# Altium PCB ecg-go.PcbDoc
Units mm, origin at the board's own origin, x right, y up, seen from the top; angles counter-clockwise.
Board outline 40 x 40 mm, 2 copper layers (Top Layer, Bottom Layer), stack 1.071 mm thick; 43 components, 44 nets, 168 pads, 37 vias.
Unrouted connection lines stored in the file: 25.
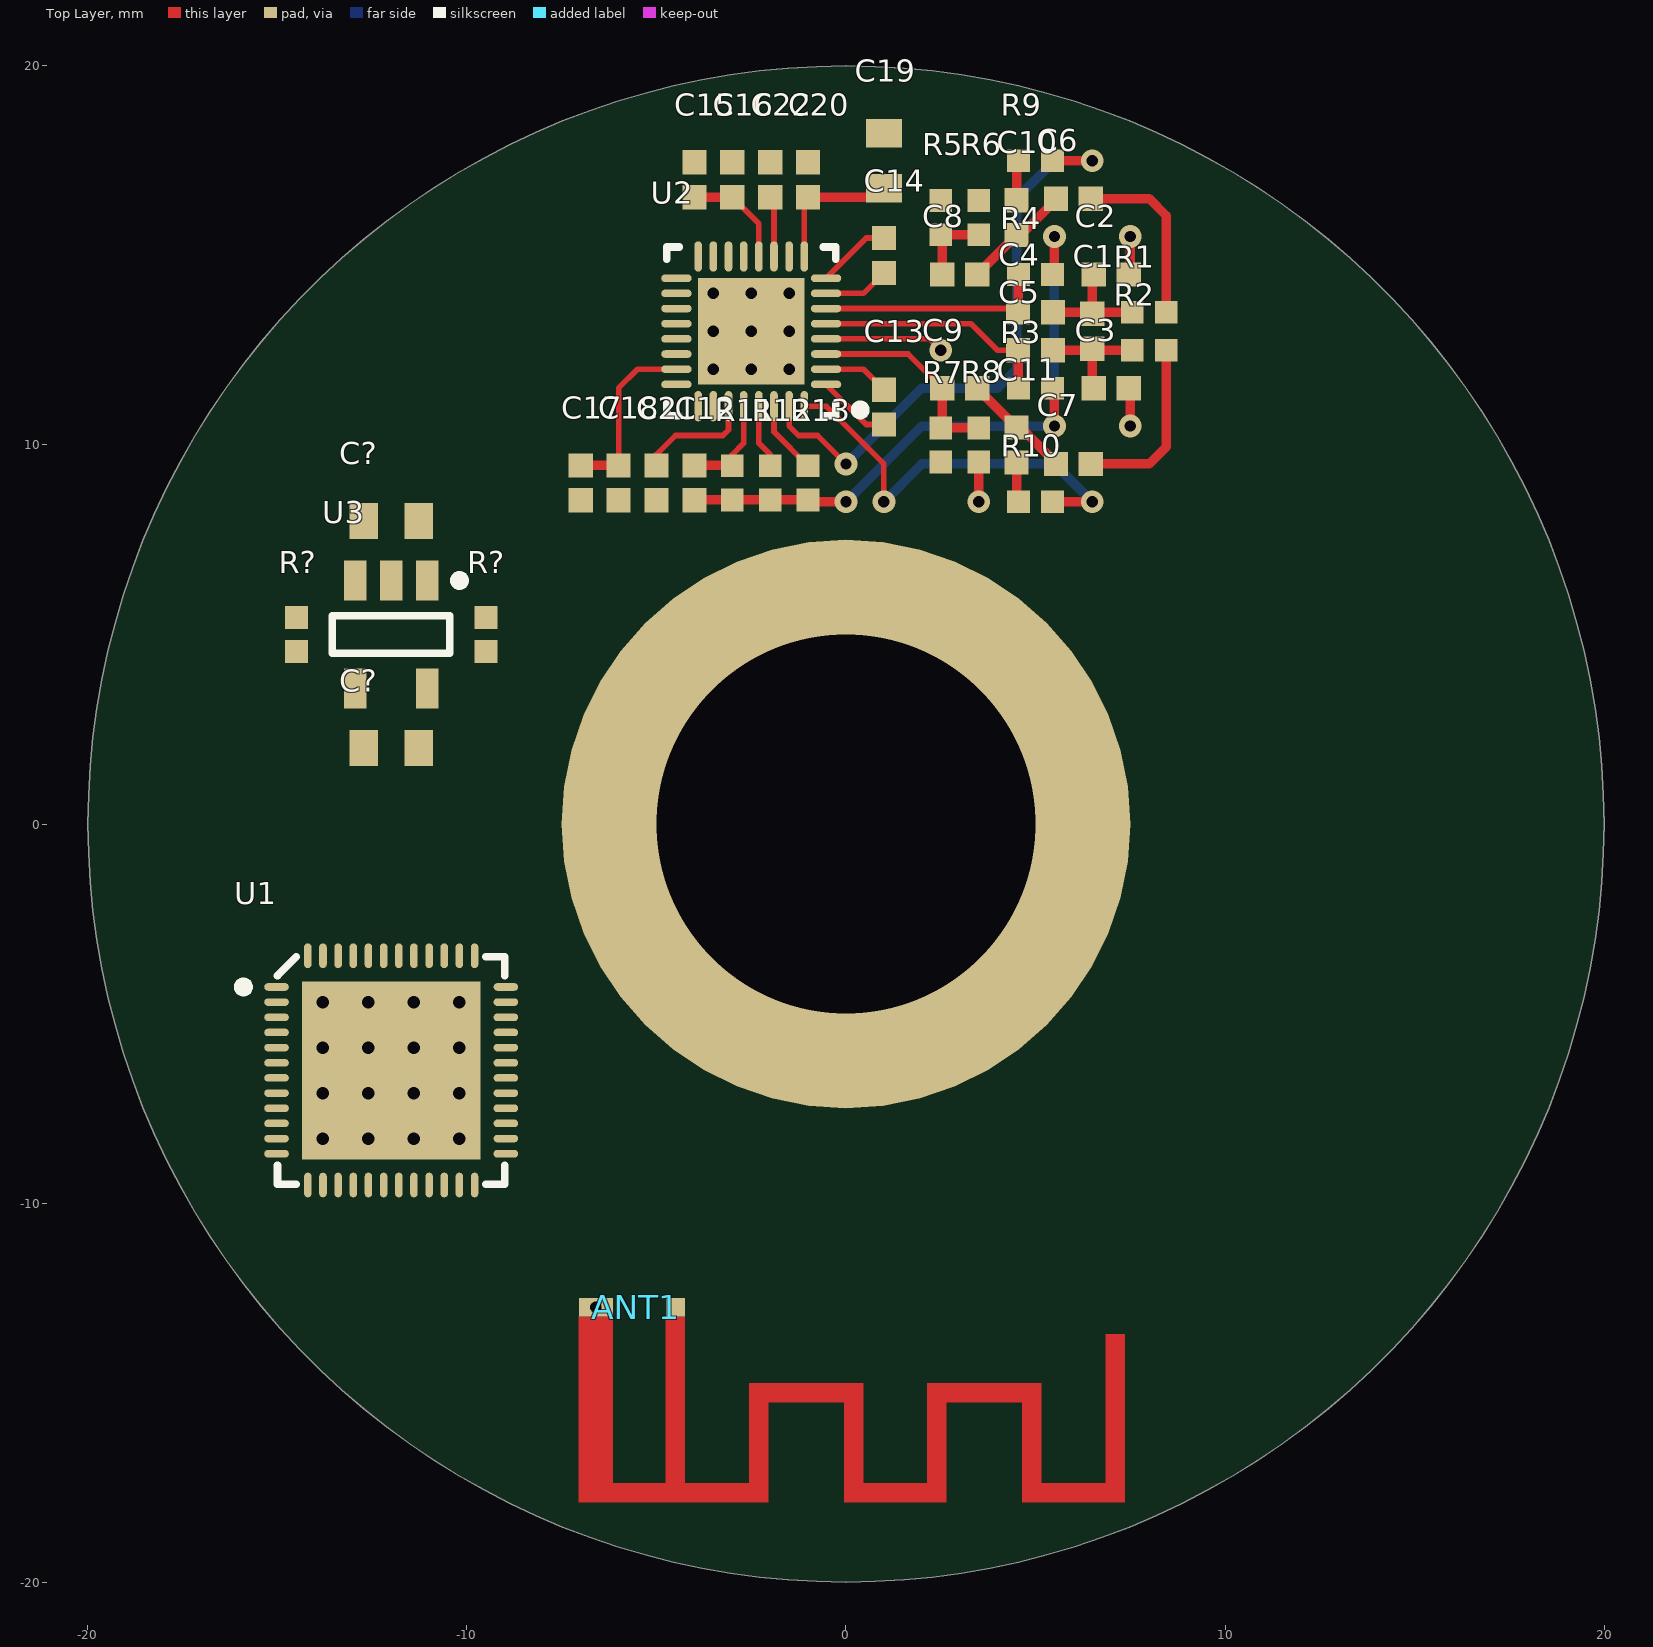
[diagram p0: Top Layer view]
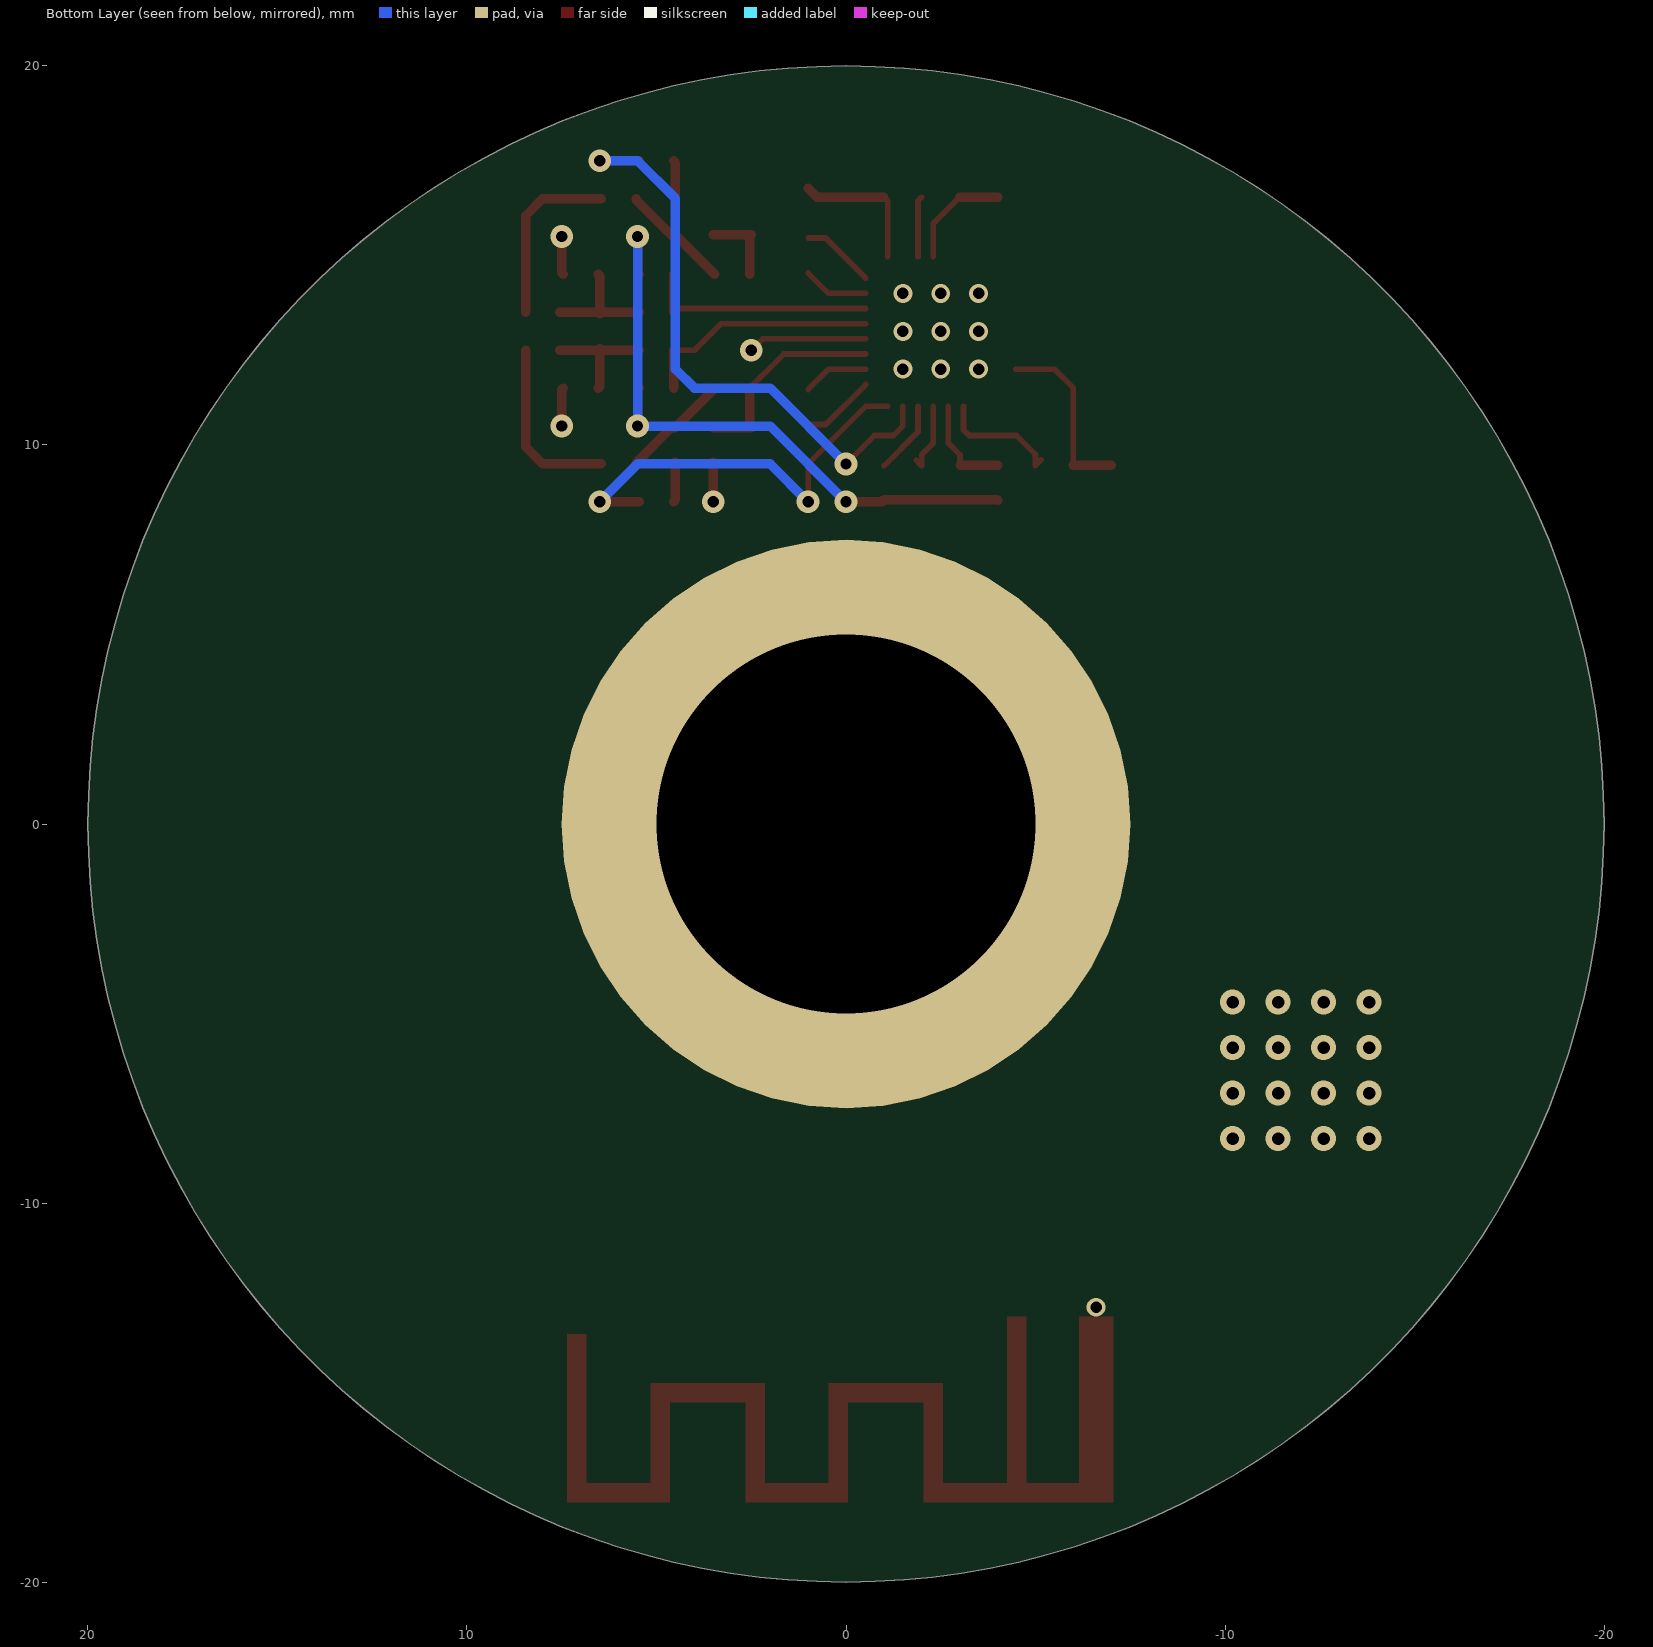
[diagram p1: Bottom Layer view, seen from below]
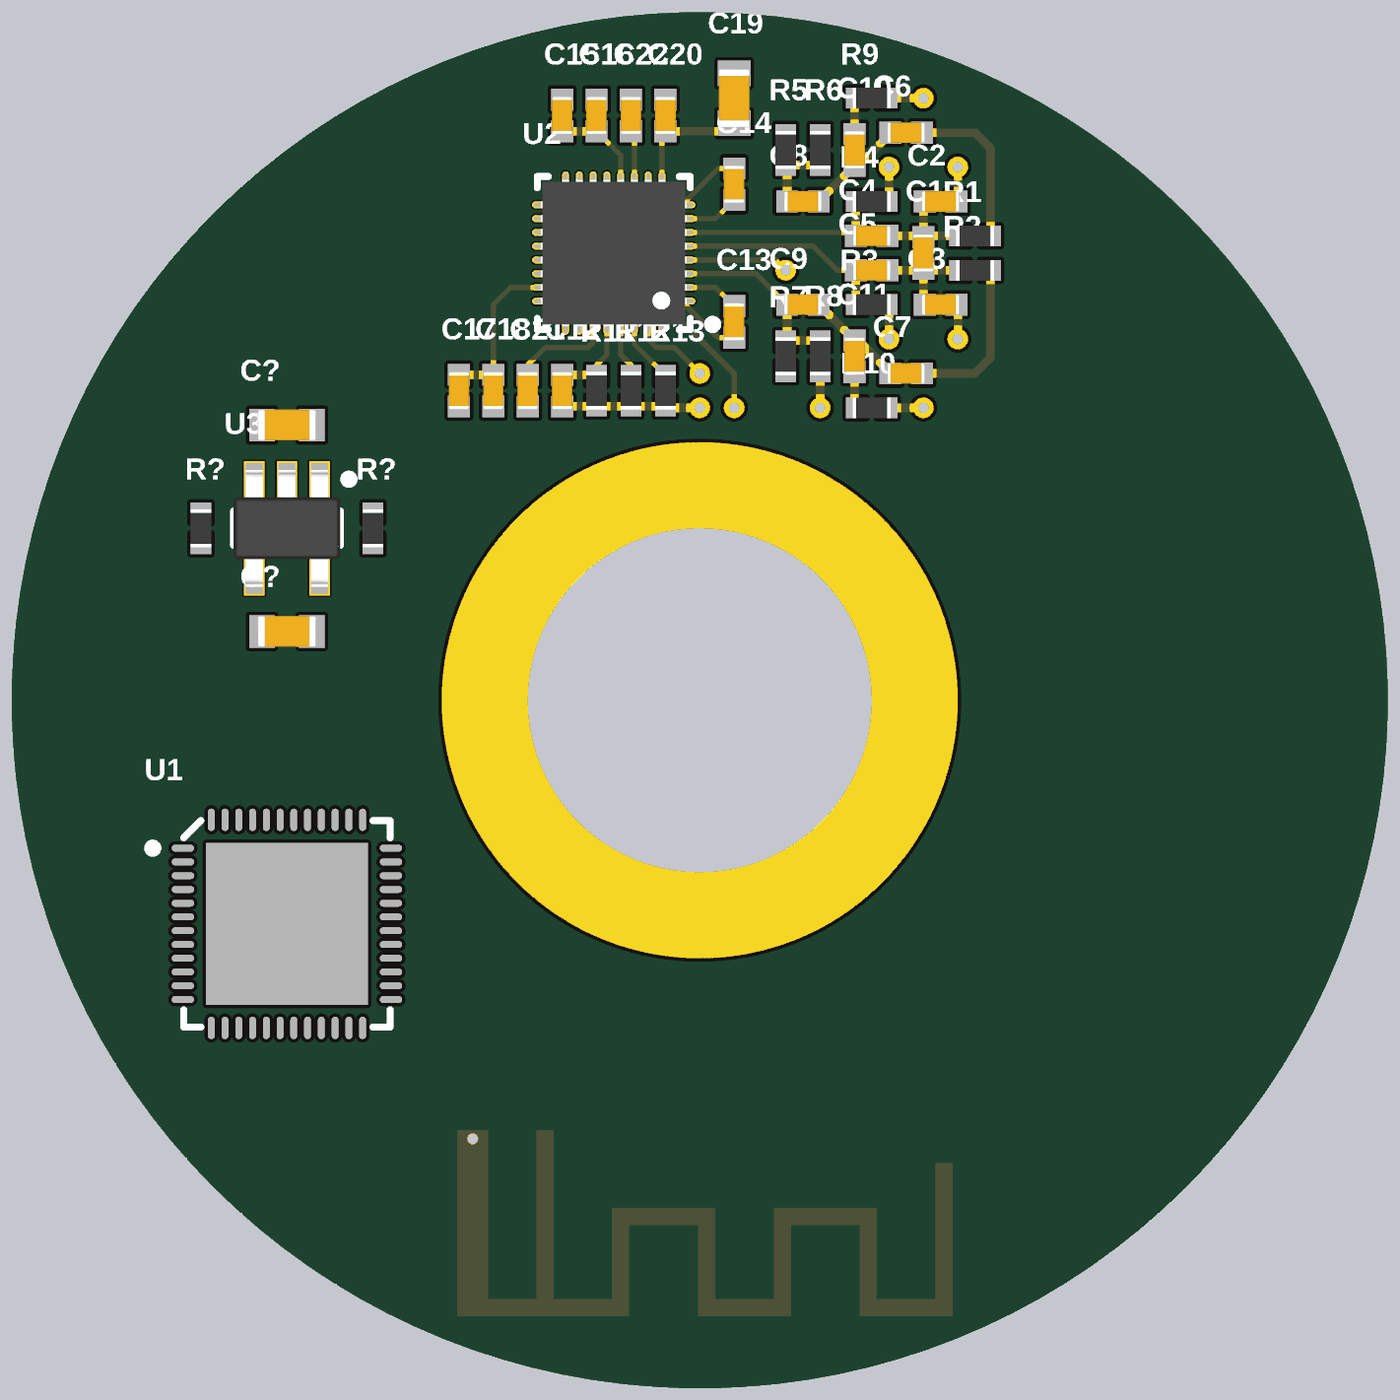
[diagram p2: 3D render of the assembled board from above, using the file's embedded part models]

## Layer stack, top to bottom
Top Solder: solder mask 0.0102, Solder Resist, Dk 3.5
Top Layer: signal copper 0.0356
Dielectric 1: dielectric 1, FR-4, Dk 4.8
Bottom Layer: signal copper 0.0356
Bottom Solder: solder mask 0.0102, Solder Resist, Dk 3.5

## Board outline
0,-20 cw(c0,0) -20,0 cw(c0,0) 0,20 cw(c0,0) 20,0 cw(c0,0)

## Design rules (kind name [scope] priority, off if disabled: settings)
Clearance [All] p1: gap=0.15
HoleSize [All] p1: absolutevalues=TRUE maxlimit=6.3 minlimit=0.3 maxpercent=80.000 minpercent=20.000
PolygonConnect [All] p1: connectstyle=Relief reliefconductorwidth=0.25 reliefentries=4 polygonreliefangle="90 Angle" airgapwidth=0.3
RoutingVias [All] p1: holewidth=0.3 width=0.6 viastyle="Through Hole" minholewidth=0.3 minwidth=0.6 maxholewidth=6.3 maxwidth=10.6
SolderMaskExpansion [All] p1: expansion=0.102
Width [All] p1: maxlimit=10 minlimit=0.15 preferedwidth=0.25
29 further rules are at their usual default settings.

## Classes and differential pairs
component class U_core: ANT1 U1
component class U_afe: C1 C2 C3 C4 C5 C6 C7 C8 C9 C10 C11 C12 C13 C14 C15 C16 C17 C18 C19 C20 C21 C22 R1 R2 R3 R4 R5 R6 R7 R8 R9 R10 R11 R12 R13 U2
component class U_batt_power: C? R? U3

## Components (designator, comment, footprint, x,y, rotation, side; value= is the part's Value field where it differs from the comment)
ANT1 "2.4 GHz" ANT2.4GHZ_MIFA -4.5,-13 r0 top
C1 "2.2n" C0402 6.5,13 r270 top
C2 "100p" C0402 7,14.5 r0 top
C3 "100p" C0402 7,11.5 r180 top
C4 "1u" C0402 5,13.5 r180 top
C5 "1u" C0402 5,12.5 r180 top
C6 "0.1u" C0402 6,16.5 r0 top
C7 "0.1u" C0402 6,9.5 r180 top
C8 "2.2n" C0402 3,14.5 r0 top
C9 "2.2n" C0402 3,11.5 r0 top
C10 "2.2n" C0402 4.5,16 r270 top
C11 "2.2n" C0402 4.5,10 r270 top
C12 "1.5n" C0402 -4,9 r90 top
C13 "4.7n" C0402 1,11 r270 top
C14 "4.7n" C0402 1,15 r270 top
C15 "1u" C0402 -4,17 r270 top
C16 "0.1u" C0402 -3,17 r270 top
C17 "1u" C0402 -7,9 r90 top
C18 "0.1u" C0402 -6,9 r90 top
C19 "10u" C0603 1,17.5 r270 top
C20 "0.1u" C0402 -1,17 r270 top
C21 "1u" C0402 -5,9 r90 top
C22 "1u" C0402 -2,17 r270 top
C? "10u" C0603 -12,8 r180 top
C? "10u" C0603 -12,2 r180 top
R1 "40.2k" R0402 8,13.5 r0 top
R2 "40.2k" R0402 8,12.5 r0 top
R3 "4.7M" R0402 5,11.5 r180 top
R4 "4.7M" R0402 5,14.5 r180 top
R5 "10M" R0402 2.5,16 r90 top
R6 "10M" R0402 3.5,16 r90 top
R7 "10M" R0402 2.5,10 r270 top
R8 "10M" R0402 3.5,10 r270 top
R9 "40.2k" R0402 5,17.5 r180 top
R10 "40.2k" R0402 5,8.5 r180 top
R11 "1M" R0402 -3,9 r90 top
R12 "0" R0402 -2,9 r90 top
R13 "0" R0402 -1,9 r270 top
R? "1k" R0402 -14.5,5 r270 top
R? "2.2k" R0402 -9.5,5 r90 top
U1 "nRF51x22-QFAA" QFN40P600X600X90-48N -12,-6.5 r0 top
U2 "ADS1292R" ADS129x_QFN -2.5,13 r180 top
U3 "MCP73831" MCP7383X -12,5 r270 top

## Footprints (in the part's own frame and the unit in brackets; to place one, negate y for a bottom-side part, rotate by r counter-clockwise, add the part's x,y. Pads: shape width x height; smd on the part's side, far side on the other; paste and mask are expansions set on the pad)
ADS129x_QFN [mm] "QFN, 32-Leads, Body 4,00x4,00mm, Pitch 0,40mm, Thermal Pad 2,80x2,80mm, IPC Medium Density"
  oval 0.8x0.2 smd paste-0.04 mask+0.05: 1(-1.975,1.4) 2(-1.975,1) 3(-1.975,0.6) 4(-1.975,0.2) 5(-1.975,-0.2) 6(-1.975,-0.6) 7(-1.975,-1) 8(-1.975,-1.4) 17(1.975,-1.4) 18(1.975,-1) 19(1.975,-0.6) 20(1.975,-0.2) 21(1.975,0.2) 22(1.975,0.6) 23(1.975,1) 24(1.975,1.4)
  oval 0.2x0.8 smd paste-0.04 mask+0.05: 9(-1.4,-1.975) 10(-1,-1.975) 11(-0.6,-1.975) 12(-0.2,-1.975) 13(0.2,-1.975) 14(0.6,-1.975) 15(1,-1.975) 16(1.4,-1.975) 25(1.4,1.975) 26(1,1.975) 27(0.6,1.975) 28(0.2,1.975) 29(-0.2,1.975) 30(-0.6,1.975) 31(-1,1.975) 32(-1.4,1.975)
  rect 2.8x2.8 smd paste-2.8 mask+0.05: 33(0,0)
  silkscreen extent -3,-2.22 2.22,2.22, body extent -2.12,-2.12 2.12,2.12, height 1
ANT2.4GHZ_MIFA [mm] "Antenna - Meandered Inverted F Antenna (IFA)"
  rect 0.5x0.5 smd paste-0.5: 1(0,0.25)
  rect 0.9x0.5 smd paste-0.9: 2(-2.1,0.25)
  Top Layer region: -2.55,0 -2.55,-4.9 2.45,-4.9 2.45,-2.26 4.45,-2.26 4.45,-4.9 7.15,-4.9 7.15,-2.26 9.15,-2.26 9.15,-4.9 11.85,-4.9 11.85,-0.46 11.35,-0.46 11.35,-4.4 9.65,-4.4 9.65,-1.76 6.65,-1.76 6.65,-4.4 4.95,-4.4 4.95,-1.76 1.95,-1.76 1.95,-4.4 0.25,-4.4 0.25,0 -0.25,0 -0.25,-4.4 -1.65,-4.4 -1.65,0
C0402 [mm] "Chip Capacitor, 2-Leads, Body 1,00x0,50mm, IPC Medium Density"
  rect 0.64x0.64 smd: 1(-0.46,0) 2(0.46,0)
  body extent -0.55,-0.3 0.55,0.3, height 0.4
C0603 [mm] "Chip Capacitor, 2-Leads, Body 1,60x0,80mm, IPC Medium Density"
  rect 0.75x0.95 smd: 1(-0.725,0) 2(0.725,0)
  body extent -0.85,-0.45 0.85,0.45, height 0.5
MCP7383X [mm] "SOT23, 5-Leads, Body 2,90x2,70mm, Pitch 0,95mm, IPC Medium Density"
  rect 1.05x0.6 smd paste-0.05 mask+0.05: 1(-1.425,0.95) 2(-1.425,0) 3(-1.425,-0.95) 4(1.425,-0.95) 5(1.425,0.95)
  silkscreen extent -1.55,-1.55 0.5,1.93, body extent -1.7,-1.55 1.7,1.55, height 1.45
QFN40P600X600X90-48N [mm]
  oval 0.65x0.2 smd: 1(-3.025,2.2) 2(-3.025,1.8) 3(-3.025,1.4) 4(-3.025,1) 5(-3.025,0.6) 6(-3.025,0.2) 7(-3.025,-0.2) 8(-3.025,-0.6) 9(-3.025,-1) 10(-3.025,-1.4) 11(-3.025,-1.8) 12(-3.025,-2.2) 25(3.025,-2.2) 26(3.025,-1.8) 27(3.025,-1.4) 28(3.025,-1) 29(3.025,-0.6) 30(3.025,-0.2) 31(3.025,0.2) 32(3.025,0.6) 33(3.025,1) 34(3.025,1.4) 35(3.025,1.8) 36(3.025,2.2)
  oval 0.2x0.65 smd: 13(-2.2,-3.025) 14(-1.8,-3.025) 15(-1.4,-3.025) 16(-1,-3.025) 17(-0.6,-3.025) 18(-0.2,-3.025) 19(0.2,-3.025) 20(0.6,-3.025) 21(1,-3.025) 22(1.4,-3.025) 23(1.8,-3.025) 24(2.2,-3.025) 37(2.2,3.025) 38(1.8,3.025) 39(1.4,3.025) 40(1,3.025) 41(0.6,3.025) 42(0.2,3.025) 43(-0.2,3.025) 44(-0.6,3.025) 45(-1,3.025) 46(-1.4,3.025) 47(-1.8,3.025) 48(-2.2,3.025)
  rect 4.7x4.7 smd: 49(0,0)
  silkscreen extent -4.02,-3 3,3, body extent -3,-3 3,3, height 0.9
R0402 [mm] "Chip Resistor, 2-Leads, Body 1,00x0,50mm, IPC Medium Density"
  rect 0.6x0.6 smd: 1(-0.45,0) 2(0.45,0)
  body extent -0.55,-0.3 0.55,0.3, height 0.4

## Part data
ANT1: library part "Antenna 2.4 GHz", "Antenna - Meandered Inverted F Antenna (IFA)"
C1 C2 C3 C4 C5 C6 C7 C8 C9 C10 C11 C12 C13 C14 C15 C16 C17 C18 C19 C20 C21 C22 C? C?: library part Capacitor, "Capacitor"
R1 R2 R3 R4 R5 R6 R7 R8 R9 R10 R11 R12 R13 R? R?: library part Resistor, "Resistor"
U1: "Multi-protocol Bluetooth Low Energy, ANT and 2.4GHz proprietary system-on-chip"
U2: "IC - Analog Front End - Medical"
U3: "IC - Battery Charger, Single Cell Li-Ion/LiPo, 0.5A"

## Free pads (board coordinates)
  round 15 hole 10: 0(0,0)

## Via types
v1: diameter 0.66, hole 0.33, Top Layer to Bottom Layer, 16 vias
v2: diameter 0.6, hole 0.3, Top Layer to Bottom Layer, 11 vias
v3: diameter 0.5, hole 0.3, Top Layer to Bottom Layer, 9 vias
v4: diameter 0.5, hole 0.3, Top Layer to Bottom Layer, tented both sides, 1 vias

## Nets (pads, with @x,y where several pads share a name; then routed paths per layer and width w, separated by ;. In a path a pad name is that pad's centre, name@x,y a point inside that pad or via, vN(x,y) a via of type N, cw(c..) or ccw(c..) an arc to the next point about the centre after c; other vN are vias at no path point)
AFE_CLK: U2.17
AFE_CLKSEL: U2.14
AFE_CS: U2.18
AFE_DIN: U2.19
AFE_DOUT: U2.21
AFE_DRDY: U2.22
AFE_ECG_BIAS: C12.1 R3.1 R4.1 R11.1 R12.1 R13.2 | length 17.4
  Top Layer w0.25: C12.1 -3.99,8.55 R11.1 R12.1 R13.2 -0.95,8.5 v2(0,8.5) ; R3.1 5.5,11.45 v2(5.5,10.5) ; R4.1 5.5,14.55 v2(5.5,15.5)
  Bottom Layer w0.25: v2(0,8.5) 2,10.5 v2(5.5,10.5) v2(5.5,15.5)
AFE_GPIO1: U2.26
AFE_GPIO2: U2.25
AFE_RESET: U2.15
AFE_RESP_BIAS_N: C9.1 R7.1 R8.1 U2.3 | length 5.5
  Top Layer w0.15: U2.3 1.64,12.4 C9.1
  Top Layer w0.25: C9.1 2.54,10.49 R7.1 R8.1
AFE_RESP_BIAS_P: C8.1 R5.1 R6.1 U2.4 | length 5.2
  Top Layer w0.15: U2.4 2.2,12.8 v2(2.5,12.5)
  Top Layer w0.25: C8.1 2.54,15.51 R5.1 R6.1
AFE_SCLK: U2.20
AFE_START: U2.16
AFE_VCAP1: C22.2 U2.11 | length 1.6
  Top Layer w0.15: C22.2 -1.9,16.44 U2.11
AFE_VCAP2: C21.2 U2.27 | length 3.3
  Top Layer w0.15: C21.2@-5.145,9.605 C21.2 -5,9.75 -4.5,10.25 -3.25,10.25 -3.1,10.4 U2.27
AFE_VREFP: C19.2 C20.2 U2.9 | length 3.7
  Top Layer w0.15: U2.9 -1.1,16.44 C20.2
  Top Layer w0.25: C20.2 0.765,16.54 C19.2
AGND: C2.2 C3.1 C15.1 C16.1 C17.1 C18.1 C19.1 C20.1 C21.1 C22.1 R6.2 R8.2 U2.10 U2.13 U2.24 | length 3.1
  Top Layer w0.25: v2(3.5,8.5) R8.2 ; C3.1 7.5,11.46 v2(7.5,10.5) ; C2.2 7.5,14.54 v2(7.5,15.5)
ELEC_LA: C7.1 R2.2 | length 4.7
  Top Layer w0.25: C7.1 8,9.5 8.45,9.95 R2.2
ELEC_RA: C6.2 R1.2 | length 4.7
  Top Layer w0.25: C6.2 8,16.5 8.45,16.05 R1.2
GND: C?.1 R?.2@-9.5,5.45 U1.49 U3.2
  other v1: -13.8,-8.3 -12.6,-8.3 -11.4,-8.3 -10.2,-8.3 -13.8,-7.1 -12.6,-7.1 -11.4,-7.1 -10.2,-7.1 -13.8,-5.9 -12.6,-5.9 -11.4,-5.9 -10.2,-5.9 -13.8,-4.7 -12.6,-4.7 -11.4,-4.7 -10.2,-4.7
NetC1_1: C1.1 C2.1 C4.1 R1.1 | length 3.1
  Top Layer w0.25: C4.1 C1.1@6.5,13.5 ; C1.1 C1.1@6.5,13.5 ; C2.1 6.5,14.46 C1.1@6.5,13.5 ; R1.1 C1.1@6.5,13.5
NetC1_2: C1.2 C3.2 C5.1 R2.1 | length 3.2
  Top Layer w0.25: C5.1 6.46,12.5 C1.2 ; C3.2 6.5,11.54 C1.2 ; R2.1 6.54,12.5 C1.2
NetC4_2: C4.2 R4.2 U2.6 | length 6.1
  Top Layer w0.15: U2.6 4.44,13.6 C4.2
  Top Layer w0.25: C4.2 4.54,14.49 R4.2
NetC5_2: C5.2 R3.2 U2.5 | length 6.4
  Top Layer w0.15: U2.5 3.3,13.2 4,12.5 C5.2
  Top Layer w0.25: C5.2 4.54,11.51 R3.2
NetC6_1: C6.1 C8.2 C10.2 | length 2.9
  Top Layer w0.25: C8.2 C10.2 4.609,15.54 5.54,16.471 C6.1
NetC7_2: C7.2 C9.2 C11.1 | length 2.9
  Top Layer w0.25: C9.2 C11.1 4.609,10.46 5.54,9.529 C7.2
NetC10_1: C10.1 R9.2 | length 1.1
  Top Layer w0.25: C10.1 4.5,17.45 R9.2
NetC11_2: C11.2 R10.2 | length 1.1
  Top Layer w0.25: C11.2 4.5,8.55 R10.2
NetC12_2: C12.2 R11.2 U2.28 | length 2.7
  Top Layer w0.15: R11.2@-3.01,9.46 -3.01,9.74 -2.7,10.05 U2.28
  Top Layer w0.25: C12.2 R11.2@-3.01,9.46
NetC13_1: C13.1 U2.2 | length 1.7
  Top Layer w0.15: U2.2 0.46,12 C13.1
NetC13_2: C13.2 U2.1 | length 2
  Top Layer w0.15: U2.1 0.535,10.54 C13.2
NetC14_1: C14.1 U2.8 | length 2
  Top Layer w0.15: U2.8 0.535,15.46 C14.1
NetC14_2: C14.2 U2.7 | length 1.7
  Top Layer w0.15: U2.7 0.46,14 C14.2
NetR9_1: R9.1 U2.31 | length 15.9
  Top Layer w0.15: U2.31 -1.5,10.5 -1.25,10.25 -0.75,10.25 v2(0,9.5)
  Top Layer w0.25: R9.1 v2(6.5,17.5)
  Bottom Layer w0.25: v2(0,9.5) 2,11.5 4,11.5 4.5,12 4.5,16.5 5.5,17.5 v2(6.5,17.5)
NetR10_1: R10.1 U2.32 | length 11.1
  Top Layer w0.15: U2.32 -0.525,11.025 1,9.5 v2(1,8.5)
  Top Layer w0.25: R10.1 v2(6.5,8.5)
  Bottom Layer w0.25: v2(1,8.5) 2,9.5 5.5,9.5 v2(6.5,8.5)
NetR12_2: R12.2 U2.29 | length 1.9
  Top Layer w0.15: U2.29 -2.3,10.05 -2,9.75 R12.2 R12.2@-1.85,9.6
NetR13_1: R13.1 U2.30 | length 1.9
  Top Layer w0.15: U2.30 -1.9,10.35 R13.1
NetR?_1: R?.1@-9.5,4.55 U3.5
PWR_BATT: C?.2@-12.725,8 U3.3
PWR_CHRG_STAT: R?.1@-14.5,5.45 U3.1
PWR_CHRG_VIN: C?.2@-12.725,2 U3.4
VDD_AFE_A: C15.2 C16.2 R5.2 R7.2 U2.12 | length 2.9
  Top Layer w0.15: C16.2 -2.3,15.84 U2.12
  Top Layer w0.25: C15.2 C16.2
VDD_AFE_D: C17.2 C18.2 U2.23 | length 4.8
  Top Layer w0.15: C18.2 -6,11.5 -5.5,12 U2.23
  Top Layer w0.25: C17.2 C18.2
pads on no net: ANT1.1 ANT1.2 R?.2@-14.5,4.55 U1.1 U1.2 U1.3 U1.4 U1.5 U1.6 U1.7 U1.8 U1.9 U1.10 U1.11 U1.12 U1.13 U1.14 U1.15 U1.16 U1.17 U1.18 U1.19 U1.20 U1.21 U1.22 U1.23 U1.24 U1.25 U1.26 U1.27 U1.28 U1.29 U1.30 U1.31 U1.32 U1.33 U1.34 U1.35 U1.36 U1.37 U1.38 U1.39 U1.40 U1.41 U1.42 U1.43 U1.44 U1.45 U1.46 U1.47 U1.48 U2.33
copper on no net:
  other v3: -3.5,12 -2.5,12 -1.5,12 -3.5,13 -2.5,13 -1.5,13 -3.5,14 -2.5,14 -1.5,14
  other v4: -6.6,-12.75

## Silkscreen, mask and mechanical layers (free items; w line width, h text height)
Mechanical 1:
  circle w0.25: c0,0 r20